# Altium PCB A_D.000000.001.PcbDoc
Units mm, origin at the board's own origin, x right, y up, seen from the top; angles counter-clockwise.
Board outline 30 x 30 mm, 2 copper layers (Top Layer, Bottom Layer), stack 1.48 mm thick; 27 components, 20 nets, 84 pads, 0 vias.
Unrouted connection lines stored in the file: 1.
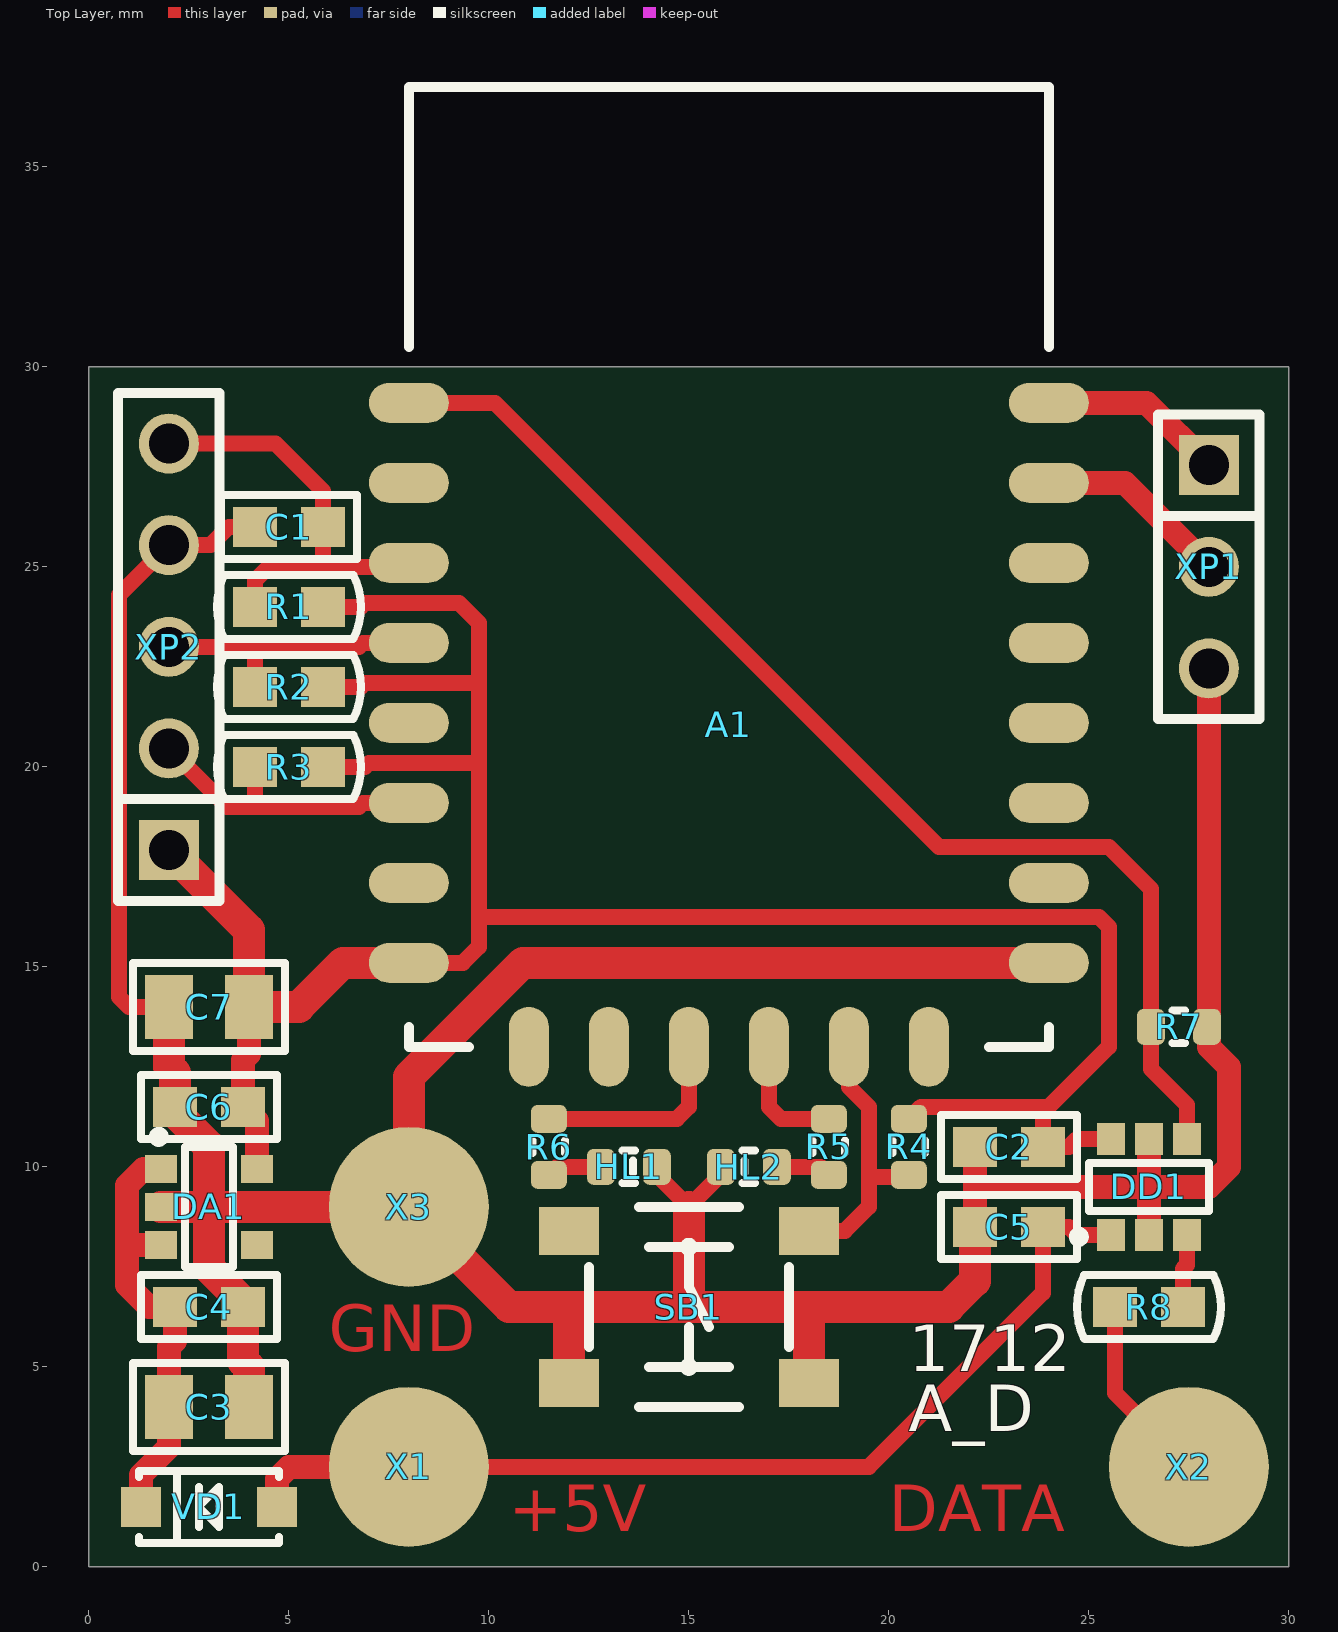
[diagram p0: Top Layer view]
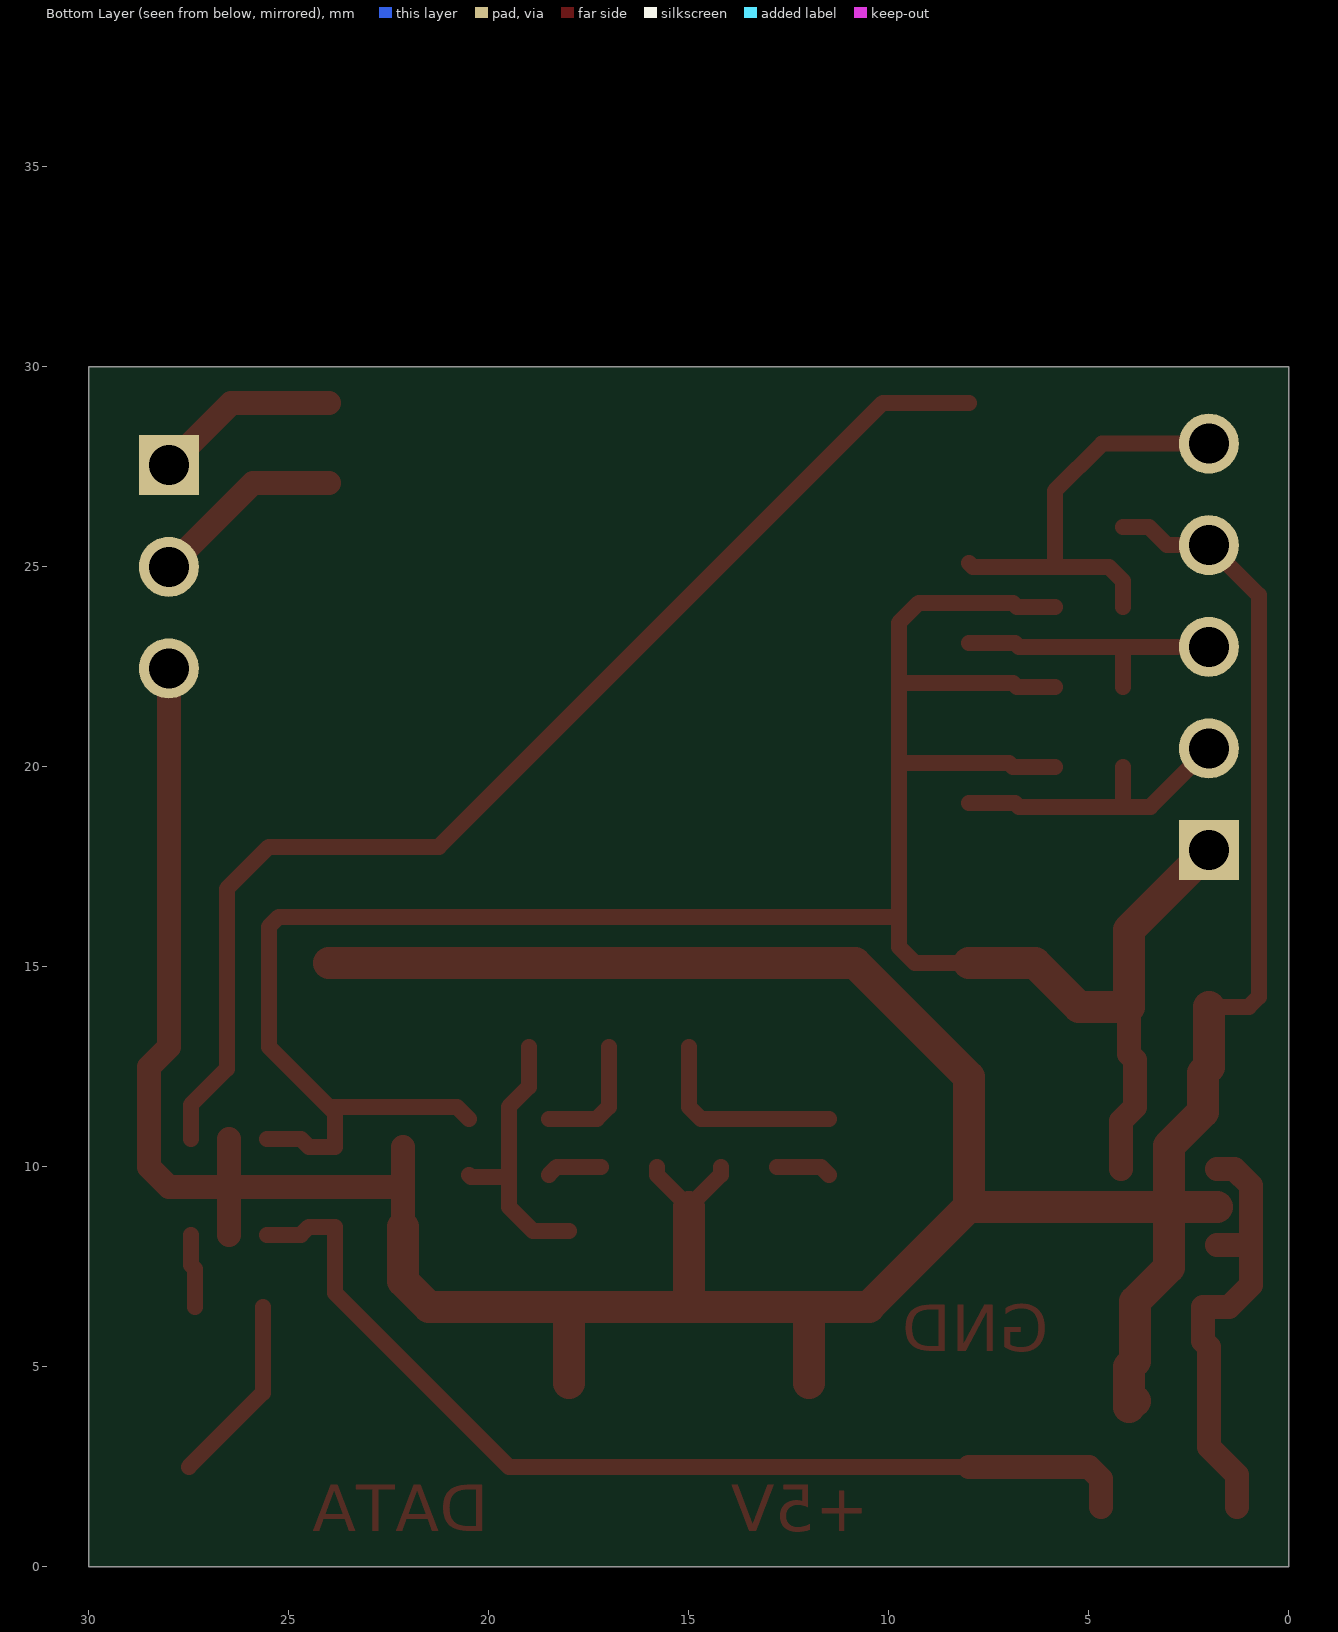
[diagram p1: Bottom Layer view, seen from below]
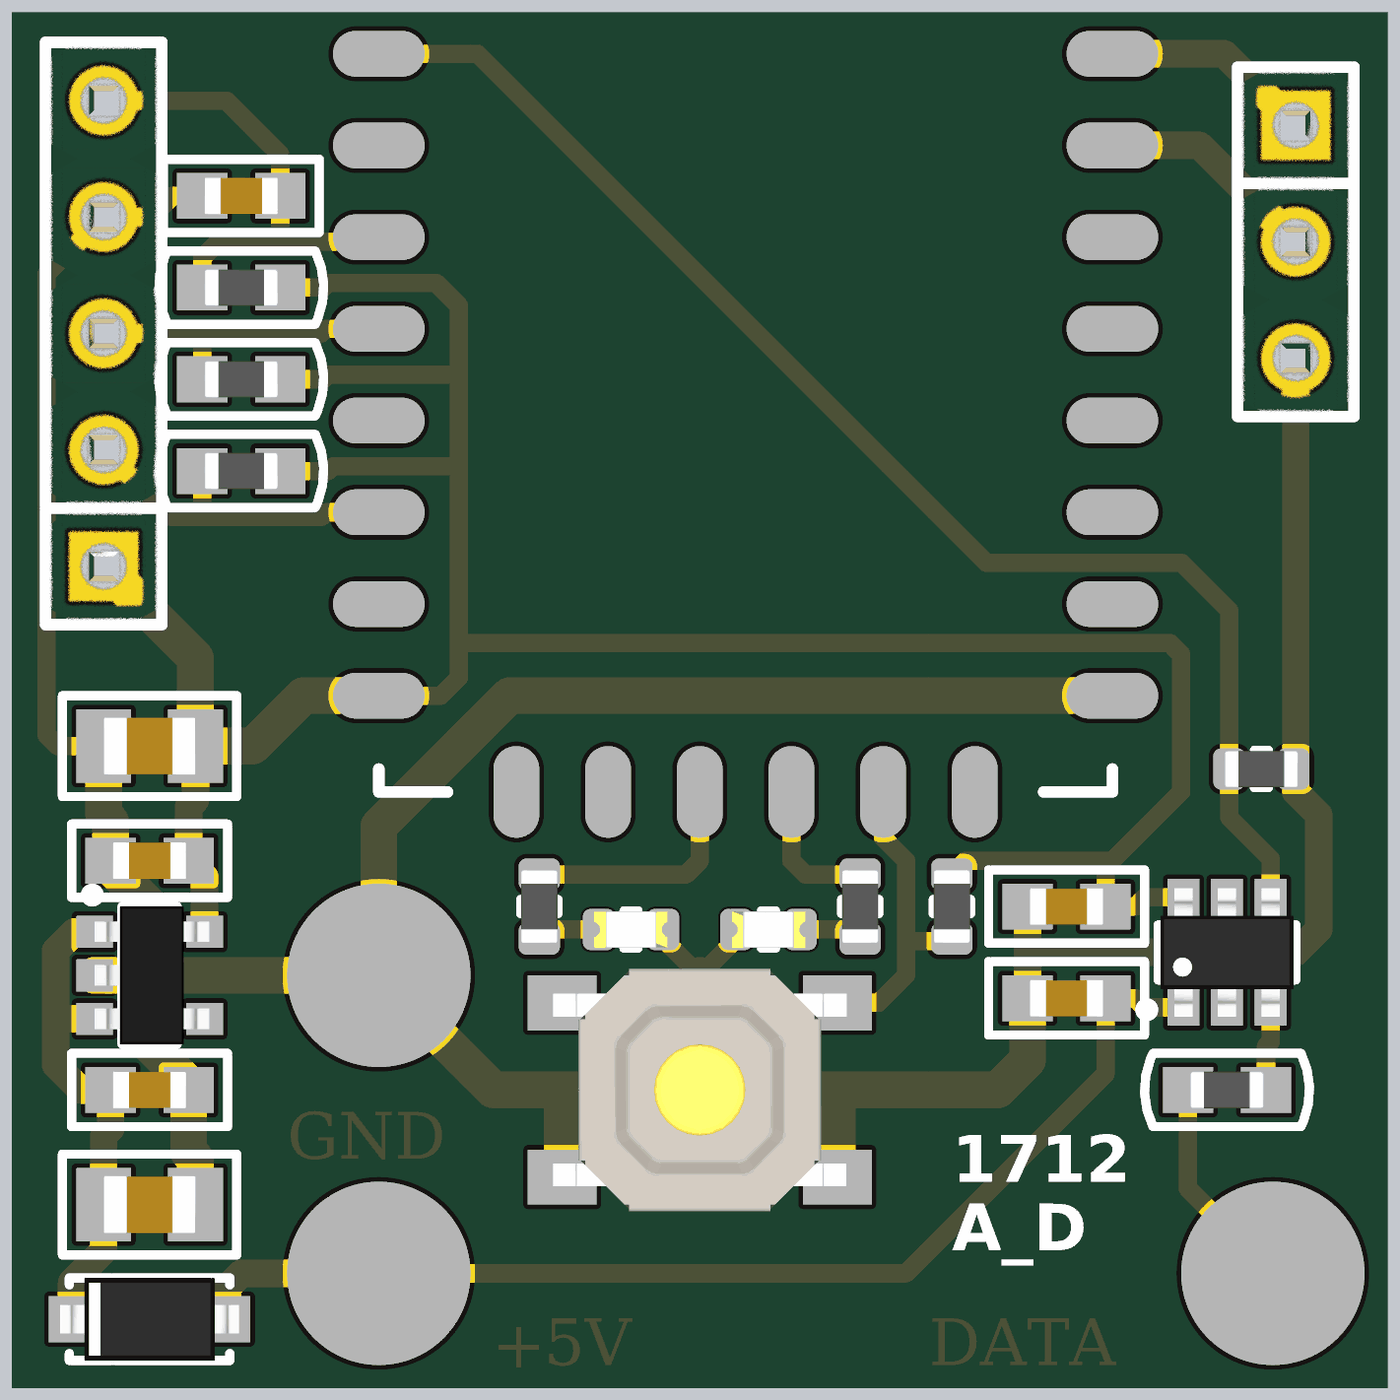
[diagram p2: 3D render of the assembled board from above, using the file's embedded part models]

## Layer stack, top to bottom
Top Solder: solder mask 0.01, Solder Resist, Dk 3.5
Top Layer: signal copper 0.03
Dielectric1: core 1.42, FR-4, Dk 4.2
Bottom Layer: signal copper 0.03
Bottom Solder: solder mask 0.01, Solder Resist, Dk 3.5

## Board outline
0,0 30,0 30,30 0,30

## Design rules (kind name [scope] priority, off if disabled: settings)
Clearance Clearance_ANT [InNetClass('ANT_Class') vs InPolygon] p1: gap=0.6 ignorepadtopadclearanceinfootprint=FALSE except(0: Arc-Hole Track-Hole SMDPad-Hole THPad-Hole Via-Hole Fill-Hole Poly-Hole Region-Hole Text-Hole)
Clearance Clearance_GND_Poly [(InNet('GND') AND InPolygon )] p2: gap=0.2 ignorepadtopadclearanceinfootprint=FALSE except(0: Arc-Hole Track-Hole SMDPad-Hole THPad-Hole Via-Hole Fill-Hole Poly-Hole Region-Hole Text-Hole)
Clearance [All] p3: gap=0.15 ignorepadtopadclearanceinfootprint=FALSE except(0: Arc-Hole Track-Hole SMDPad-Hole THPad-Hole Via-Hole Fill-Hole Poly-Hole Region-Hole Text-Hole)
ComponentClearance [All] p1 off: gap=0.25 collisioncheckmode=3 verticalgap=0.25 showdistances=FALSE
DiffPairsRouting [All] p1: maxlimit=0.4 minlimit=0.15 mostfreqgap=0.25 toplayer_minwidth=0.2 toplayer_maxwidth=0.4 toplayer_prefwidth=0.25 bottomlayer_minwidth=0.2 bottomlayer_maxwidth=0.4 bottomlayer_prefwidth=0.25 maxuncoupledlength=12
Height [All] p1: minheight=0 maxheight=25 prefheight=25
HoleSize [All] p1: absolutevalues=TRUE maxlimit=6 minlimit=0.3 maxpercent=80.000 minpercent=20.000
HoleToHoleClearance [All] p1: gap=0.25 allowstackedmicrovias=TRUE
MinimumSolderMaskSliver [All] p1 off: minsoldermaskwidth=0.254
PlaneClearance [All] p1: clearance=0.5
PlaneConnect [All] p1: planeconnectstyle=Relief reliefexpansion=0.5 reliefentries=4 reliefconductorwidth=0.25 reliefairgap=0.25
PolygonConnect PolygonConnect_XW1 [InComponent('XW1') vs IsPolygon] p1: connectstyle=Direct reliefconductorwidth=0.254 reliefentries=4 polygonreliefangle="90 Angle" airgapwidth=0.254
PolygonConnect PolygonConnect_Components [InComponent('C*') OR InComponent('R*') OR InComponent('NR*') OR InComponent('DA*') OR InComponent('DD*') OR InComponent('HL*')] p2: connectstyle=Relief reliefconductorwidth=0.2 reliefentries=4 polygonreliefangle="90 Angle" airgapwidth=0.25
PolygonConnect PolygonConnect_Connectors [All vs (InPadClass('All Pads'))] p3: connectstyle=Relief reliefconductorwidth=0.6 reliefentries=4 polygonreliefangle="90 Angle" airgapwidth=0.3
PolygonConnect PolygonConnect_Via [All] p4: connectstyle=Direct reliefconductorwidth=0.254 reliefentries=4 polygonreliefangle="90 Angle" airgapwidth=0.254
RoutingCorners [All] p1: cornerstyle=45-Degree minsetback=1.5 maxsetback=3.5
RoutingVias [All] p1: holewidth=0.6 width=1.2 viastyle="Through Hole" minholewidth=0.3 minwidth=0.6 maxholewidth=1 maxwidth=2
SMDEntry [All] p1: side=TRUE corner=TRUE anyangle=TRUE
SilkToSilkClearance [All] p1 off: silktosilkclearance=0.254
SilkToSolderMaskClearance [IsPad] p1 off: minsilkscreentomaskgap=0.254 clearancetoexposedcopper=TRUE
SolderMaskExpansion [All] p1: expansion=0.1
Width [All] p1: maxlimit=8 minlimit=0.2 preferedwidth=0.6
Width Width_TrackEnds [All] p2 off: maxlimit=0.25 minlimit=0.25 preferedwidth=0.25 checkconnectedcopper=TRUE
19 further rules are at their usual default settings.

## Components (designator, comment, footprint, x,y, rotation, side; value= is the part's Value field where it differs from the comment)
A1 "RTL-00_01" RTL-00 16,25 r0 top locked
C1 "Capacitor" C0603 5,26 r0 top
C2 "Capacitor" C0603 23,10.5 r0 top
C3 "Capacitor" C0805 3,4 r180 top
C4 "Capacitor" C0603 3,6.5 r180 top
C5 "Capacitor" C0603 23,8.5 r0 top
C6 "Capacitor" C0603 3,11.5 r0 top
C7 "Capacitor" C0805 3,14 r0 top
DA1 "MIC5205-Series" SOT-23-5 3,9 r270 top
DD1 "SN74AVC1T45D" SOT-23-6 26.5,9.5 r0 top
HL1 "ОК" LD0603_L 13.5,10 r0 top
HL2 "Ошибка" LD0603_L 16.5,10 r180 top
R1 "Resistor" R0603 5,24 r0 top
R2 "Resistor" R0603 5,22 r0 top
R3 "Resistor" R0603 5,20 r0 top
R4 "Resistor" R0603_L 20.5,10.5 r90 top
R5 "Resistor" R0603_L 18.5,10.5 r270 top
R6 "Resistor" R0603_L 11.5,10.5 r270 top
R7 "Resistor" R0603_L 27.25,13.5 r180 top
R8 "Resistor" R0603 26.5,6.5 r180 top
SB1 "Сброс настроек" SKQGABE010 15,6.5 r270 top
VD1 "Schottky" SOD-123 3,1.5 r180 top
X1 "+5V" SMDPad_4.0 8,2.5 r0 top
X2 "Data" SMDPad_4.0 27.5,2.5 r0 top
X3 "GND" SMDPad_4.0 8,9 r0 top
XP1 "Log UART" PLS-3 28,25 r270 top locked
XP2 "SWD" PLS-5 2,23 r90 top locked

## Footprints (in the part's own frame and the unit in brackets; to place one, negate y for a bottom-side part, rotate by r counter-clockwise, add the part's x,y. Pads: shape width x height; smd on the part's side, far side on the other; paste and mask are expansions set on the pad)
C0603 [mm] "1608M"
  rect 1.1x1 smd: 1(-0.85,0) 2(0.85,0)
  silkscreen extent -1.7,-0.8 1.7,0.8, body extent -0.8,-0.4 0.8,0.4, height 0.91
C0805 [mm] "2012M"
  rect 1.2x1.6 smd: 1(-1,0) 2(1,0)
  silkscreen extent -1.9,-1.1 1.9,1.1, body extent -1,-0.62 1,0.63, height 1.01
LD0603_L [mm] "Chip Led; Body 1.6 x 0.8 mm (LxW typ)"
  rrect50% 0.7x0.9 smd mask+0.05: 1(-0.7,0) 2(0.7,0)
  silkscreen extent -0.15,-0.41 0.15,0.41, body extent -0.8,-0.4 0.8,0.4, height 0.7
PLS-3 [mm]
  rect 1.5x1.5 hole 1: 1(-2.54,0)
  round 1.5 hole 1: 2(0,0) 3(2.54,0)
  silkscreen extent -3.81,-1.27 3.81,1.27, body extent -3.81,-1.27 3.81,1.27, height 8.9
PLS-5 [mm]
  rect 1.5x1.5 hole 1: 1(-5.08,0)
  round 1.5 hole 1: 2(-2.54,0) 3(0,0) 4(2.54,0) 5(5.08,0)
  silkscreen extent -6.35,-1.27 6.35,1.27, body extent -6.35,-1.27 6.35,1.27, height 8.9
R0603 [mm] "1608M"
  rect 1.1x1 smd: 1(-0.85,0) 2(0.85,0)
  silkscreen extent -1.8,-0.8 1.8,0.8, body extent -0.8,-0.4 0.8,0.4, height 0.38
R0603_L [mm] "Chip Resistor; Body 1.6 x 0.8 mm (LxW typ)"
  rrect50% 0.7x0.9 smd: 1(-0.7,0) 2(0.7,0)
  silkscreen extent -0.15,-0.41 0.15,0.41, body extent -0.8,-0.4 0.8,0.4, height 0.38
RTL-00 [mm] "Wi-Fi Module on RTL8710AF"
  oval 2x1 smd: 1(-8,4.1) 2(-8,2.1) 3(-8,0.1) 4(-8,-1.9) 5(-8,-3.9) 6(-8,-5.9) 7(-8,-7.9) 8(-8,-9.9) 15(8,-9.9) 16(8,-7.9) 17(8,-5.9) 18(8,-3.9) 19(8,-1.9) 20(8,0.1) 21(8,2.1) 22(8,4.1)
  oval 1x2 smd: 9(-5,-12) 10(-3,-12) 11(-1,-12) 12(1,-12) 13(3,-12) 14(5,-12)
  Top Layer pour cut-out: 8.5,6 8.5,12.5 -8.5,12.5 -8.5,6
  Bottom Layer pour cut-out: 8.5,6 8.5,12.5 -8.5,12.5 -8.5,6
  silkscreen extent -8,-12 8,12, body extent -8,-12 8,12, height 0.8
SKQGABE010 [mm]
  rect 1.2x1.5 smd: 1(-1.9,3) 1(-1.9,-3) 2(1.9,3) 2(1.9,-3)
  silkscreen extent -2.5,-2.5 2.5,2.5, body extent -2.65,-3.2 2.65,3.2, height 1.42
SMDPad_4.0 [mm]
  round 4 smd: 1(0,0)
SOD-123 [mm] "КД-36"
  rect 1x1 smd: 1(-1.7,0) 2(1.7,0)
  silkscreen extent -1.75,-0.9 1.75,0.9, body extent -1.95,-0.9 1.95,0.9, height 1.19
SOT-23-5 [mm]
  rect 0.7x0.8 smd: 1(-0.95,-1.2) 2(0,-1.2) 3(0.95,-1.2) 4(0.95,1.2) 5(-0.95,1.2)
  silkscreen extent -1.87,-1.37 1.5,0.6, body extent -1.5,-1.2 1.5,1.3, height 1.09
SOT-23-6 [mm]
  rect 0.7x0.8 smd: 1(-0.95,-1.2) 2(0,-1.2) 3(0.95,-1.2) 4(0.95,1.2) 5(0,1.2) 6(-0.95,1.2)
  silkscreen extent -1.87,-1.37 1.5,0.6, body extent -1.45,-1.4 1.45,1.4, height 1.45

## Part data
A1: library part RTL-00
C1 C2 C4 C5 C6: library part GRM188R71C104KA01D
C3 C7: library part GRM21BR60J226ME39L
DA1: library part MIC5205-3.3YM5
DD1: library part SN74AVC1T45DBVR
HL1: library part BL-LS0603GC
HL2: library part BL-LS0603HC
R1 R2 R3 R4: library part RC0603JR-0710KL
R5 R6: library part RC0603JR-07330RL
R7: library part RC0603JR-074K7L
R8: library part RC0603JR-07100R
SB1: library part SKQGABE010
VD1: library part SD103CW
X1 X2 X3: library part SMDPad
XP1: library part PLS-3
XP2: library part PLS-5

## Nets (pads, with @x,y where several pads share a name; then routed paths per layer and width w, separated by ;. In a path a pad name is that pad's centre, name@x,y a point inside that pad or via, vN(x,y) a via of type N, cw(c..) or ccw(c..) an arc to the next point about the centre after c; other vN are vias at no path point)
DVCC5P0: C3.2 C4.2 DA1.1 DA1.3 VD1.2 | length 11.2
  Top Layer w0.6: VD1.2 1.3,2.3 2,3 C3.2 2,5.5 2.15,5.65 C4.2 1.5,6.5 0.95,7.05 0.95,8 ; DA1.3 1,8.05 0.95,8 ; DA1.1 1.364,9.95 0.95,9.536 0.95,8
GND: A1.15 C1.1 C2.1 C3.1 C4.1 C5.1 C6.1 C7.1 DA1.2 DD1.2 DD1.5 HL1.2 HL2.2 R7.1 SB1.2 X3.1 XP1.3 XP2.4 | length 102.6
  Top Layer w0.4: C7.1 1,14 0.75,14.25 0.75,24.29 XP2.4 3.04,25.54 3.5,26 C1.1 ; HL1.2 14.2,9.8 15,9 15.8,9.8 HL2.2
  Top Layer w0.6: C5.1 22.15,9.5 ; C2.1 22.15,9.5 ; DD1.2 26.5,9.5 ; DD1.5 26.5,9.5 ; XP1.3 28,13 28.5,12.5 28.5,10 28,9.5 26.5,9.5 ; 22.15,9.5 26.5,9.5
  Top Layer w0.8: DA1.2 3,9 ; C7.1 2,12.5 2.15,12.35 C6.1 2.15,11.372 3,10.522 3,9 ; C3.1@3.85,4.15 C3.1 4,5 3.85,5.15 C4.1 3.85,6.628 3,7.478 3,9 ; SB1.2@12,4.6 12,6.5 ; 15,9 15,6.5 ; SB1.2@18,4.6 18,6.5 ; C5.1 22.15,7.15 21.5,6.5 18,6.5 ; A1.15 10.85,15.1 8,12.25 X3.1 ; 3,9 X3.1 ; X3.1 10.5,6.5 12,6.5 ; 12,6.5 15,6.5 ; 15,6.5 18,6.5
LED_ERR: A1.12 R5.1 | length 3.1
  Top Layer w0.4: A1.12 17,11.5 17.3,11.2 R5.1
LED_OK: A1.11 R6.1 | length 5.1
  Top Layer w0.4: R6.1 14.7,11.2 15,11.5 A1.11
LOG_RX: A1.21 XP1.2 | length 4.9
  Top Layer w0.6: A1.21 25.9,27.1 XP1.2
LOG_TX: A1.22 XP1.1 | length 4.6
  Top Layer w0.6: A1.22 26.44,29.1 XP1.1
NetDD1_3: DD1.3 R8.1 | length 1.8
  Top Layer w0.4: R8.1 27.35,7.45 27.45,7.55 DD1.3
NetHL1_1: HL1.1 R6.2 | length 1.4
  Top Layer w0.4: R6.2 11.7,10 HL1.1
NetHL2_1: HL2.1 R5.2 | length 1.4
  Top Layer w0.4: HL2.1 18.3,10 R5.2
NRESET: A1.3 C1.2 R1.1 XP2.5 | length 10.9
  Top Layer w0.4: XP2.5 4.67,28.08 5.85,26.9 C1.2 5.85,25 ; R1.1 4.15,24.65 4.5,25 5.85,25 ; A1.3 7.9,25 5.85,25
SPI_MISO: A1.19
SPI_MOSI: A1.1 DD1.4 R7.2 | length 30.2
  Top Layer w0.4: A1.1 10.15,29.1 21.25,18 25.5,18 26.55,16.95 R7.2 26.55,12.45 27.45,11.55 DD1.4
SPI_NCS: A1.18
SPI_SCLK: A1.20
STRES: A1.13 R4.1 SB1.1 | length 7
  Top Layer w0.4: SB1.1@18,8.4 18.9,8.4 19.5,9 19.5,9.75 ; A1.13 19,12 19.5,11.5 19.5,9.75 ; R4.1 20.45,9.75 19.5,9.75
SWD_CLK: A1.4 R2.1 XP2.3 | length 7
  Top Layer w0.4: XP2.3 4.15,23 ; R2.1 4.15,23 ; A1.4 6.85,23.1 6.75,23 4.15,23
SWD_DATA: A1.6 R3.1 XP2.2 | length 7.6
  Top Layer w0.4: XP2.2 3.46,19 4.15,19 ; R3.1 4.15,19 ; A1.6 6.85,19.1 6.75,19 4.15,19
VCC3P3: A1.8 C2.2 C6.2 C7.2 DA1.5 DD1.6 R1.2 R2.2 R3.2 R4.2 XP2.1 | length 63
  Top Layer w0.4: R3.2 6.9,20 7,20.1 9.75,20.1 ; R2.2 6.8,22 6.9,22.1 9.75,22.1 ; R1.2 6.8,24 6.9,24.1 9.25,24.1 9.75,23.6 9.75,22.1 ; A1.8 9.35,15.1 9.75,15.5 9.75,16.25 ; R4.2 20.8,11.5 24,11.5 ; DD1.6 24.7,10.7 24.5,10.5 C2.2 23.85,11.35 24,11.5 ; 9.75,16.25 25.25,16.25 25.5,16 25.5,13 24,11.5 ; 9.75,16.25 9.75,20.1 ; 9.75,20.1 9.75,22.1
  Top Layer w0.6: C7.2 4,12.825 3.85,12.675 C6.2 4.2,11.15 DA1.5
  Top Layer w0.8: XP2.1 4,15.92 C7.2 5.25,14 6.35,15.1 A1.8
VCC5P0: C5.2 DD1.1 VD1.1 X1.1 | length 25.2
  Top Layer w0.4: X1.1 19.5,2.5 23.85,6.85 C5.2 24.5,8.5 24.7,8.3 DD1.1
  Top Layer w0.6: VD1.1 4.7,2.2 5,2.5 X1.1
WS_DATA: R8.2 X2.1 | length 4.8
  Top Layer w0.4: R8.2 25.65,4.35 X2.1
pads on no net: A1.2 A1.5 A1.7 A1.9 A1.10 A1.14 A1.16 A1.17 DA1.4

## Other copper
Top Layer:
  text "GND" at 6,5 h2
  text "+5V" at 10.5,0.5 h2
  text "DATA" at 20,0.5 h2

## Silkscreen, mask and mechanical layers (free items; w line width, h text height)
Top Overlay:
  text "1712" at 20.5,4.5 h2
  text "A_D" at 20.5,3 h2
1 - Board Outline:
  the board outline again, w0.1
11 - Dementions (Top):
  lines w0.254: -2.508,1.524 -2,0 ; -2.508,28.476 -2,30 ; -2.254,0 -1.746,0 ; -2.254,30 -1.746,30 ; -2,9.896 -2,0 ; -2,20.104 -2,30 ; -1.492,1.524 -2,0 ; -1.492,28.476 -2,30 ; 0,-2.254 0,-1.746 ; 1.524,-2.508 0,-2 ; 1.524,-1.492 0,-2 ; 9.896,-2 0,-2 ; 20.104,-2 30,-2 ; 28.476,-2.508 30,-2 ; 28.476,-1.492 30,-2 ; 30,-2.254 30,-1.746
  text "30 (mm)" at -1.086,10.15 h1.52 r90
  text "30 (mm)" at 10.15,-2.914 h1.52